# Altium PCB PCB3.PcbDoc
Units mil, origin at the board's own origin, x right, y up, seen from the top; angles counter-clockwise.
Board outline 6000 x 4000 mil, 2 copper layers (Top Layer, Bottom Layer); 18 components, 0 nets, 124 pads, 18 vias.
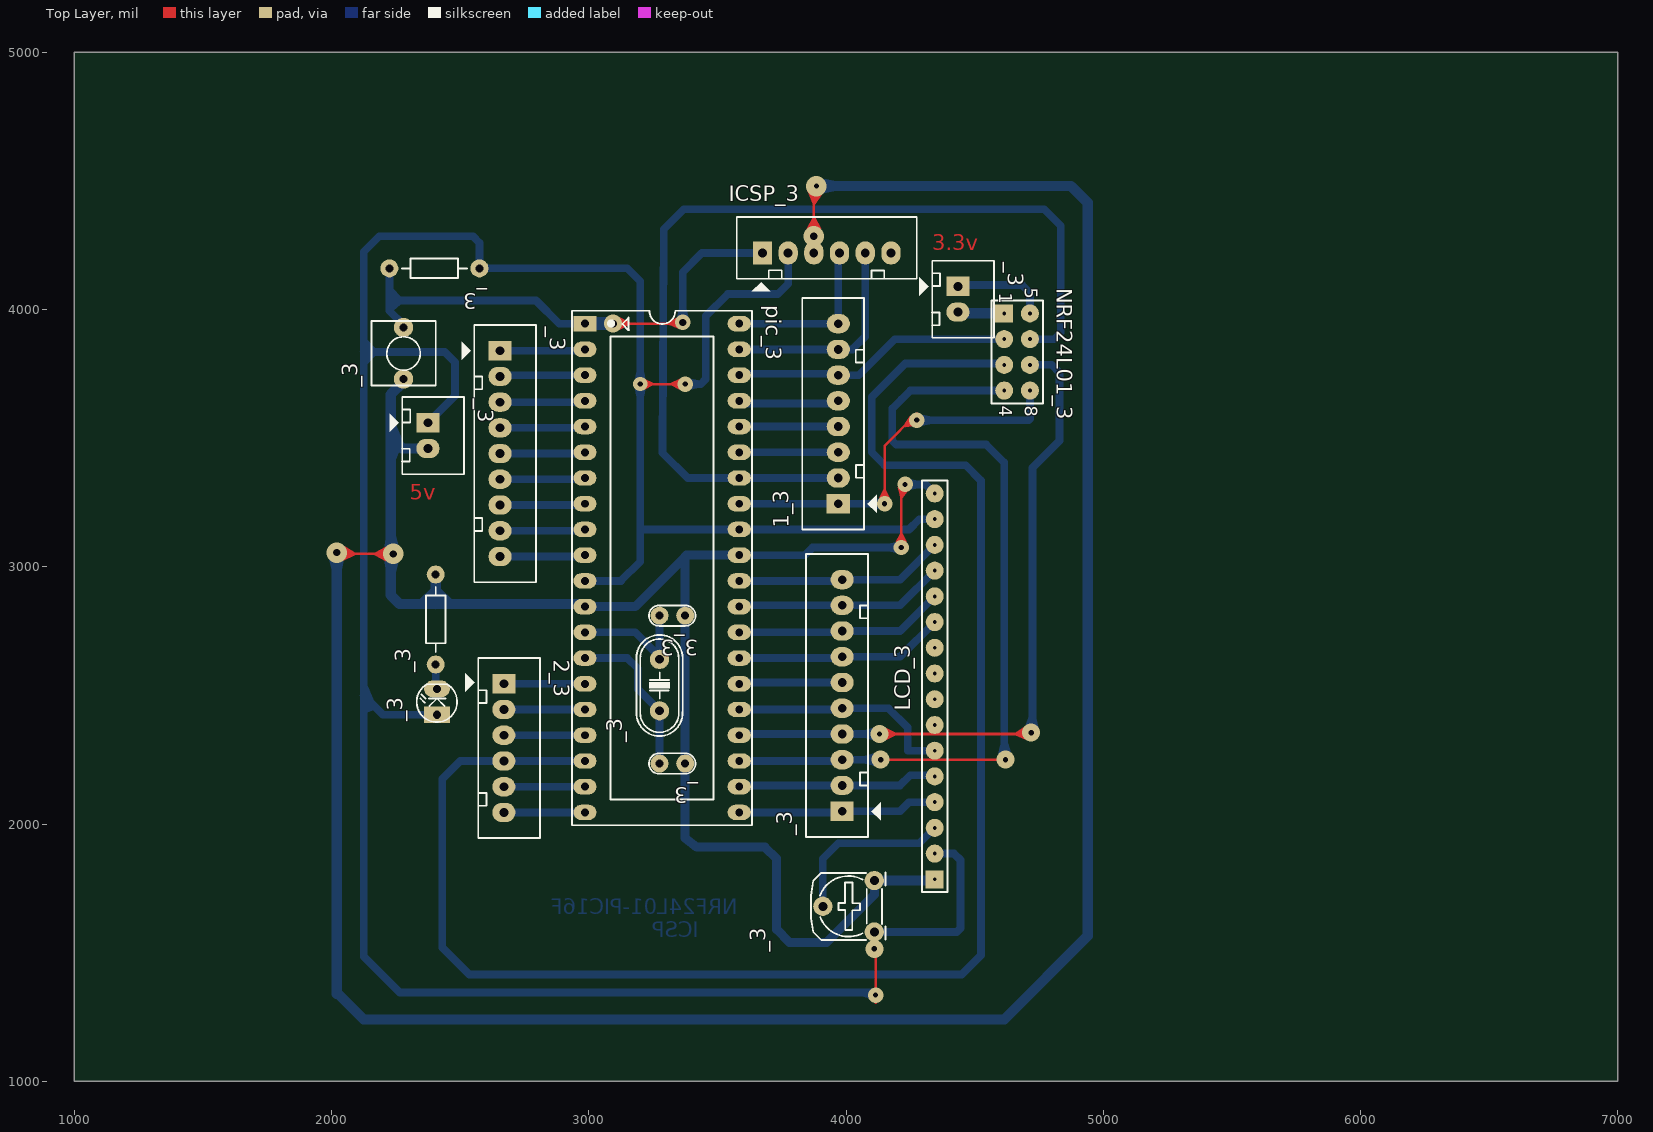
[diagram p0: Top Layer view]
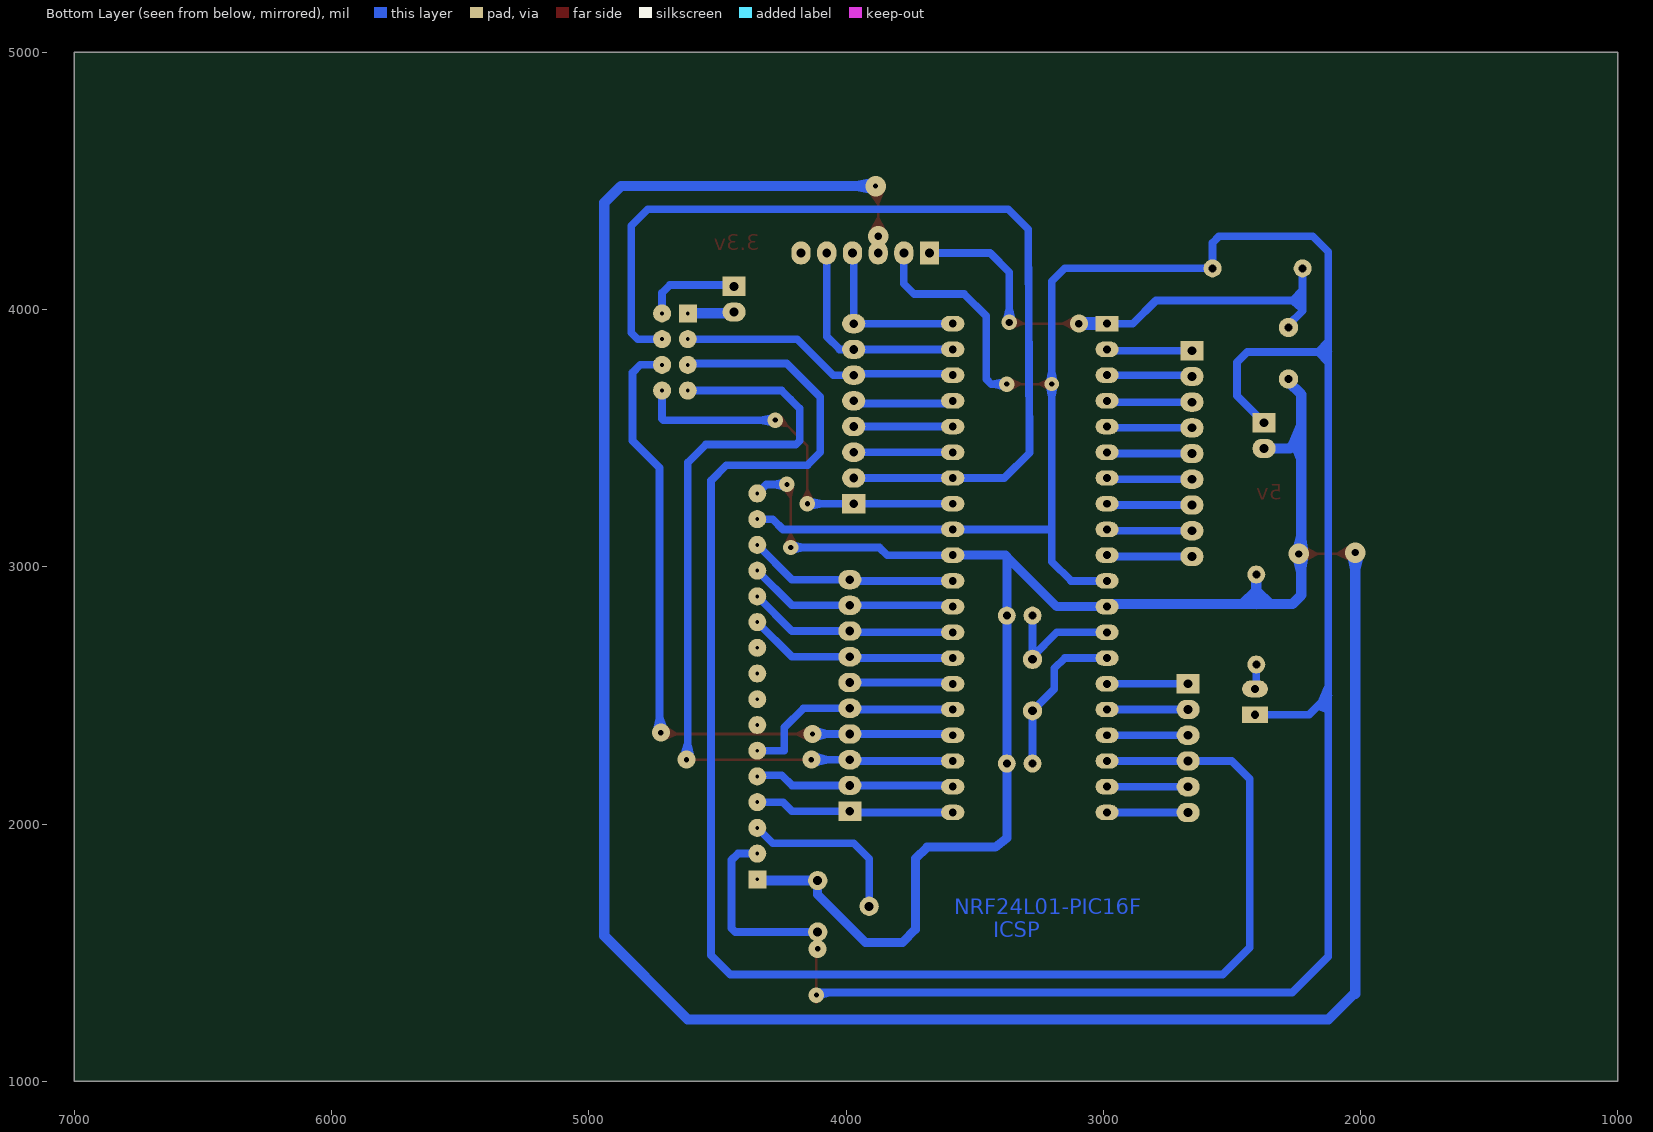
[diagram p1: Bottom Layer view, seen from below]

## Layer stack, top to bottom
Top Solder: solder mask 0.4, Solder Resist, Dk 3.5
Top Layer: signal copper 1.4
Dielectric 1: dielectric 12.6, FR-4, Dk 4.8
Bottom Layer: signal copper 1.4
Bottom Solder: solder mask 0.4, Solder Resist, Dk 3.5

## Board outline
1000,1000 7000,1000 7000,5000 1000,5000

## Design rules (kind name [scope] priority, off if disabled: settings)
Clearance [All] p1: gap=10
PolygonConnect [All] p1: connectstyle=Relief reliefconductorwidth=10 reliefentries=4 polygonreliefangle="90 Angle" airgapwidth=10
RoutingVias [All] p1: holewidth=28 width=50 viastyle="Through Hole" minholewidth=28 minwidth=50 maxholewidth=28 maxwidth=50
SolderMaskExpansion [All] p1: expansion=4
Width [All] p1: maxlimit=10 minlimit=10 preferedwidth=10
30 further rules are at their usual default settings.

## Components (designator, comment, footprint, x,y, rotation, side; value= is the part's Value field where it differs from the comment)
1_3 "Comment" CON8 3970,3245 r90 top
2_3 "Comment" CON6 2670,2545 r270 top
3_3 "Comment" CN1 3375,2810 r180 top
_3 "Comment" VR 4110,1580 r90 top
_3 "Comment" XT2 3275,2540 r90 top
_3 "Comment" CN1 3375,2235 r180 top
_3 "Comment" CON9 2655,3840 r270 top
_3 "Comment" SW2 2280,3730 r90 top
_3 "Comment" R1/4W 2575,4160 r180 top
_3 "Comment" CON10 3985,2050 r90 top
_3 "Comment" CON2 2375,3560 r270 top
_3 "Comment" CON2 4435,4090 r270 top
_3 "Comment" LED-3 2410,2425 r90 top
_3 "Comment" R1/4W 2405,2620 r90 top
ICSP_3 "Comment" CON6 3675,4220 r0 top
LCD_3 "Comment" HDR1X16 4345,1785 r90 top
NRF24L01_3 "Comment" HDR2X4_CEN 4615,3985 r270 top
pic_3 "Comment" DIP40/W0.6 2985,3945 r270 top

## Footprints (in the part's own frame and the unit in brackets; to place one, negate y for a bottom-side part, rotate by r counter-clockwise, add the part's x,y. Pads: shape width x height; smd on the part's side, far side on the other; paste and mask are expansions set on the pad)
CN1 [mil]
  round 70 hole 31: 1(0,0) 2(100,0)
  silkscreen extent -40,-40 141,40, body extent -60,-30 170,37, height 265
CON2 [mil] "CON2"
  rect 75x90 hole 34: 1(0,0)
  oval 75x90 hole 34: 2(100,0)
  silkscreen extent -100,-150 200,140, body extent -76,-77 160,100, height 236
CON6 [mil] "CON6"
  rect 75x90 hole 34: 1(0,0)
  oval 75x90 hole 34: 2(100,0) 3(200,0) 4(300,0) 5(400,0) 6(500,0)
  silkscreen extent -100,-150 600,140
CON8 [mil] "CON8"
  rect 75x90 hole 34: 1(0,0)
  oval 75x90 hole 34: 2(100,0) 3(200,0) 4(300,0) 5(400,0) 6(500,0) 7(600,0) 8(700,0)
  silkscreen extent -100,-150 800,140
CON9 [mil] "CON9"
  rect 75x90 hole 34: 1(0,0)
  oval 75x90 hole 34: 2(100,0) 3(200,0) 4(300,0) 5(400,0) 6(500,0) 7(600,0) 8(700,0) 9(800,0)
  silkscreen extent -100,-150 900,140
CON10 [mil] "CON10"
  rect 75x90 hole 34: 1(0,0)
  oval 75x90 hole 34: 2(100,0) 3(200,0) 4(300,0) 5(400,0) 6(500,0) 7(600,0) 8(700,0) 9(800,0) 10(900,0)
  silkscreen extent -100,-150 1000,140
DIP40/W0.6 [mil] "40 PIN, W 600mil, Pin to pin 100mil"
  rect 60x90 hole 31: 1(0,0)
  oval 60x90 hole 31: 2(100,0) 3(200,0) 4(300,0) 5(400,0) 6(500,0) 7(600,0) 8(700,0) 9(800,0) 10(900,0) 11(1000,0) 12(1100,0) 13(1200,0) 14(1300,0) 15(1400,0) 16(1500,0) 17(1600,0) 18(1700,0) 19(1800,0) 20(1900,0) 21(1900,600) 22(1800,600) 23(1700,600) 24(1600,600) 25(1500,600) 26(1400,600) 27(1300,600) 28(1200,600) 29(1100,600) 30(1000,600) 31(900,600) 32(800,600) 33(700,600) 34(600,600) 35(500,600) 36(400,600) 37(300,600) 38(200,600) 39(100,600) 40(0,600)
  silkscreen extent -50,-50 1950,650, body extent -82,-10 1982,600, height 224
HDR1X16 [mil] "Connector; Header; 16 Position"
  rect 70x70 hole 15: 1(0,0)
  round 70 hole 15: 2(100,0) 3(200,0) 4(300,0) 5(400,0) 6(500,0) 7(600,0) 8(700,0) 9(800,0) 10(900,0) 11(1000,0) 12(1100,0) 13(1200,0) 14(1300,0) 15(1400,0) 16(1500,0)
  silkscreen extent -50,-50 1550,50
HDR2X4_CEN [mil] "Connector; Header; 4x2 Position"
  rect 70x70 hole 15: 1(0,0)
  round 70 hole 15: 2(100,0) 3(200,0) 4(300,0) 5(0,100) 6(100,100) 7(200,100) 8(300,100)
  silkscreen extent -50,-50 350,150
LED-3 [mil] "LED 2 PIN, 3ly Only colour"
  rect 65x100 hole 32: 1(0,0)
  oval 65x100 hole 32: 2(100,0)
  silkscreen extent -29,-78 118,79, body extent -29,-75 109,75, height 256
R1/4W [mil] "R 1/4W, 2 Pin, 350mil"
  round 70 hole 31: 1(0,0) 2(350,0)
  silkscreen extent 48,-38 302,38, body extent -40,-47 386,47, height 111
SW2 [mil] "SW button 2pin, 250x 250 mil"
  round 75 hole 31: 1(0,0) 2(200,0)
  silkscreen extent -25,-125 225,125, body extent -18,-116 218,128, height 197
VR [mil] "Resistor Variable"
  round 75 hole 35: 1(0,0) 2(100,200) 3(200,0)
  silkscreen extent -31,-44 231,246, body extent -87,-30 307,372, height 165
XT2 [mil] "Footpin for Crystal 2 pin"
  round 75 hole 34: 1(-100,0) 2(100,0)
  silkscreen extent -198,-90 195,90, body extent -233,-93 213,90, height 138

## Via types
v1: diameter 60, hole 20, Top Layer to Bottom Layer, 6 vias
v2: diameter 70, hole 20, Top Layer to Bottom Layer, 5 vias
v3: diameter 80, hole 28, Top Layer to Bottom Layer, 3 vias
v4: diameter 70, hole 30, Top Layer to Bottom Layer, 1 vias
v5: diameter 60, hole 28, Top Layer to Bottom Layer, 1 vias
v6: diameter 55, hole 20, Top Layer to Bottom Layer, 1 vias
v7: diameter 80, hole 20, Top Layer to Bottom Layer, 1 vias

## Nets (pads, with @x,y where several pads share a name; then routed paths per layer and width w, separated by ;. In a path a pad name is that pad's centre, name@x,y a point inside that pad or via, vN(x,y) a via of type N, cw(c..) or ccw(c..) an arc to the next point about the centre after c; other vN are vias at no path point)
pads on no net: 1_3.1 1_3.2 1_3.3 1_3.4 1_3.5 1_3.6 1_3.7 1_3.8 2_3.1 2_3.2 2_3.3 2_3.4 2_3.5 2_3.6 3_3.1 3_3.2 _3.1 _3.2 _3.3 _3.4 _3.5 _3.6 _3.7 _3.8 _3.9 _3.10 ICSP_3.1 ICSP_3.2 ICSP_3.3 ICSP_3.4 ICSP_3.5 ICSP_3.6 LCD_3.1 LCD_3.2 LCD_3.3 LCD_3.4 LCD_3.5 LCD_3.6 LCD_3.7 LCD_3.8 LCD_3.9 LCD_3.10 LCD_3.11 LCD_3.12 LCD_3.13 LCD_3.14 LCD_3.15 LCD_3.16 NRF24L01_3.1 NRF24L01_3.2 NRF24L01_3.3 NRF24L01_3.4 NRF24L01_3.5 NRF24L01_3.6 NRF24L01_3.7 NRF24L01_3.8 pic_3.1 pic_3.2 pic_3.3 pic_3.4 pic_3.5 pic_3.6 pic_3.7 pic_3.8 pic_3.9 pic_3.10 pic_3.11 pic_3.12 pic_3.13 pic_3.14 pic_3.15 pic_3.16 pic_3.17 pic_3.18 pic_3.19 pic_3.20 pic_3.21 pic_3.22 pic_3.23 pic_3.24 pic_3.25 pic_3.26 pic_3.27 pic_3.28 pic_3.29 pic_3.30 pic_3.31 pic_3.32 pic_3.33 pic_3.34 pic_3.35 pic_3.36 pic_3.37 pic_3.38 pic_3.39 pic_3.40
copper on no net: | length 63320
  Top Layer w10: v3@2020,3050 v3@2230,3050 ; v4(3095,3945) v5@3375,3945 ; v6(3200,3710) v1(3375,3710) ; 3580,3050 3590,3040 ; v3(3875,4285) v7@3875,4470 ; 4115,1305 v2@4115,1510 ; v2(4130,2350) 4740,2350 v2@4745,2355 ; v2(4135,2250) v2@4605,2250 ; v1(4150,3245) 4150,3470 v1@4275,3595 ; v1(4215,3075) 4215,3305 v1(4230,3320)
  Bottom Layer w10: 2010,2880 2020,2890 ; 2235,2865 2250,2880 ; 2280,3720 2280,3730 ; 2280,3930 2280,3940 ; 2405,2855 2415,2845 ; 3970,4215 3975,4220 ; 4110,1780 4150,1780 ; 4340,1780 4345,1785 ; 4830,3750 4830,3755
  Bottom Layer w30: 2125,2500 2200,2425 2410,2425 ; 2125,3835 2440,3835 2480,3795 2480,3665 2375,3560 ; 2225,4035 2795,4035 2885,3945 2985,3945 ; 2225,4160 2225,3995 2280,3940 ; 2225,4285 2550,4285 2575,4260 2575,4230 2575,4160 3150,4160 3200,4110 3200,3020 3125,2945 2985,2945 ; 2230,4285 2185,4285 2125,4225 2125,1485 2265,1345 v1@4115,1345 ; 2405,2620 2405,2530 2415,2520 ; 2645,3730 2660,3745 2985,3745 ; 2655,3040 2980,3040 ; 2655,3140 2980,3140 2985,3145 ; 2655,3240 2980,3240 2985,3245 ; 2655,3340 2980,3340 2985,3345 ; 2655,3440 2980,3440 2985,3445 ; 2655,3540 2980,3540 2985,3545 ; 2655,3640 2975,3640 2980,3635 ; 2655,3840 2980,3840 2985,3845 ; 2670,2045 2985,2045 ; 2670,2145 2985,2145 ; 2670,2345 2985,2345 ; 2670,2445 2985,2445 ; 2670,2545 2985,2545 ; 2985,2245 2670,2245 2500,2245 2430,2175 2430,1520 2535,1415 2570,1415 4375,1415 4450,1415 4525,1490 4525,3335 4465,3395 4150,3395 4100,3445 4100,3660 4230,3790 4615,3790 ; 2985,2645 3150,2645 3190,2605 3190,2525 3275,2440 3275,2235 ; 2985,2745 3180,2745 3275,2650 3275,2640 3275,2805 ; 3210,3145 3585,3145 4245,3145 4285,3185 4345,3185 ; v5@3365,3960 3365,4145 3440,4220 3675,4220 ; 3375,3040 3380,3045 ; v1(3375,3710) 3435,3710 3455,3730 3455,3975 3540,4060 3735,4060 3775,4100 3775,4220 ; 3575,3750 3965,3750 ; 3585,2045 3980,2045 ; 3585,2245 3980,2245 ; 3585,2445 3980,2445 ; 3585,2645 3980,2645 ; 3585,2745 3985,2745 ; 3585,2945 3975,2945 ; 3585,3045 3840,3045 3870,3075 v1@4195,3075 ; 3585,3245 3970,3245 v1(4150,3245) ; 3585,3445 3970,3445 ; 3585,3545 3970,3545 ; 3585,3845 3970,3845 4025,3845 4075,3895 4075,4220 ; 3585,3945 3970,3945 3970,4215 ; 3590,2150 3985,2150 4210,2150 4250,2190 4355,2190 ; 3590,2350 3985,2350 v2(4130,2350) ; 3590,2550 3985,2550 ; 3590,2850 3985,2850 4210,2850 4345,2985 ; 3595,3635 3970,3635 ; 3910,1680 3910,1865 3970,1925 4285,1925 4345,1985 ; 3970,3345 3585,3345 3385,3345 3286.23,3443.77 3291.45,4311.45 3370,4390 4770,4390 4835,4325 4835,3910 4810,3885 4710,3885 ; 3970,3745 4050,3745 4190,3885 4620,3885 ; 3985,2050 4210,2050 4245,2085 4345,2085 ; 3985,2250 v2(4135,2250) ; 3985,2450 4165,2450 4240,2375 4240,2285 4345,2285 ; 3985,2650 4210,2650 4345,2785 ; 3985,2750 4210,2750 4345,2885 ; 3985,2950 4210,2950 4345,3085 ; 4110,1580 4430,1580 4445,1595 4445,1860 4420,1885 4345,1885 ; v1(4230,3320) 4310,3320 4345,3285 ; v1@4285,3570 4710,3570 4715,3575 4715,3685 ; 4420,4095 4685,4095 4715,4065 4715,3985 ; v2@4615,2240 4615,3405 4545,3475 4195,3475 4180,3490 4180,3615 4215,3650 4250,3685 4615,3685 ; v2@4710,2365 4725,2380 4725,3385 4830,3490 4830,3750 ; 4715,3785 4780,3785 4800,3785 4830,3755
  Bottom Layer w35: 2985,2845 3145,2845 3180,2845 3380,3045 3585,3045 ; 3375,2810 3375,3040 ; 3375,2830 3375,2235 3375,2040 3375,1945 3420,1910 3685,1910 3730,1865 3730,1590 3780,1540 3925,1540 4110,1725 4110,1780 ; 3865,4230 3875,4220
  Bottom Layer w40: 2020,1340 2020,2890 v3(2020,3055) ; 2020,1345 2125,1240 4615,1240 4940,1565 4940,4415 4875,4480 v7(3885,4480) ; 2230,3505 2275,3460 2375,3460 ; 2280,3720 2230,3670 2230,2890 2265,2855 2975,2855 2985,2845 ; 2405,2855 2405,2970 ; 4110,1780 4340,1780 ; 4460,3985 4615,3985
  Bottom Layer w50: 2985,3945 v4(3095,3945)
  other v1: 4115,1335 4275,3570
  other v2: 4110,1515 4620,2250 4720,2355
  other v3: 2240,3050
  other v5: 3365,3950

## Other copper
Top Layer:
  text "3.3v" at 4335,4230 h60
  text "5v" at 2305,3260 h60
Bottom Layer:
  text "NRF24L01-PIC16F /       ICSP" at 3580,1560 h60

## Text inside footprints (layer, text, board x,y; h text height)
NRF24L01_3: Top Overlay "8" at 4695,3625 h50 r270; Top Overlay "4" at 4595,3625 h50 r270; Top Overlay "1" at 4595,4065 h50 r270; Top Overlay "5" at 4695,4085 h50 r270